# Altium PCB mach.PcbDoc
Units mil, origin at the board's own origin, x right, y up, seen from the top; angles counter-clockwise.
Board outline 1990 x 1810 mil, 2 copper layers (Top Layer, Bottom Layer); 21 components, 26 nets, 120 pads, 2 vias.
Unrouted connection lines stored in the file: 1.
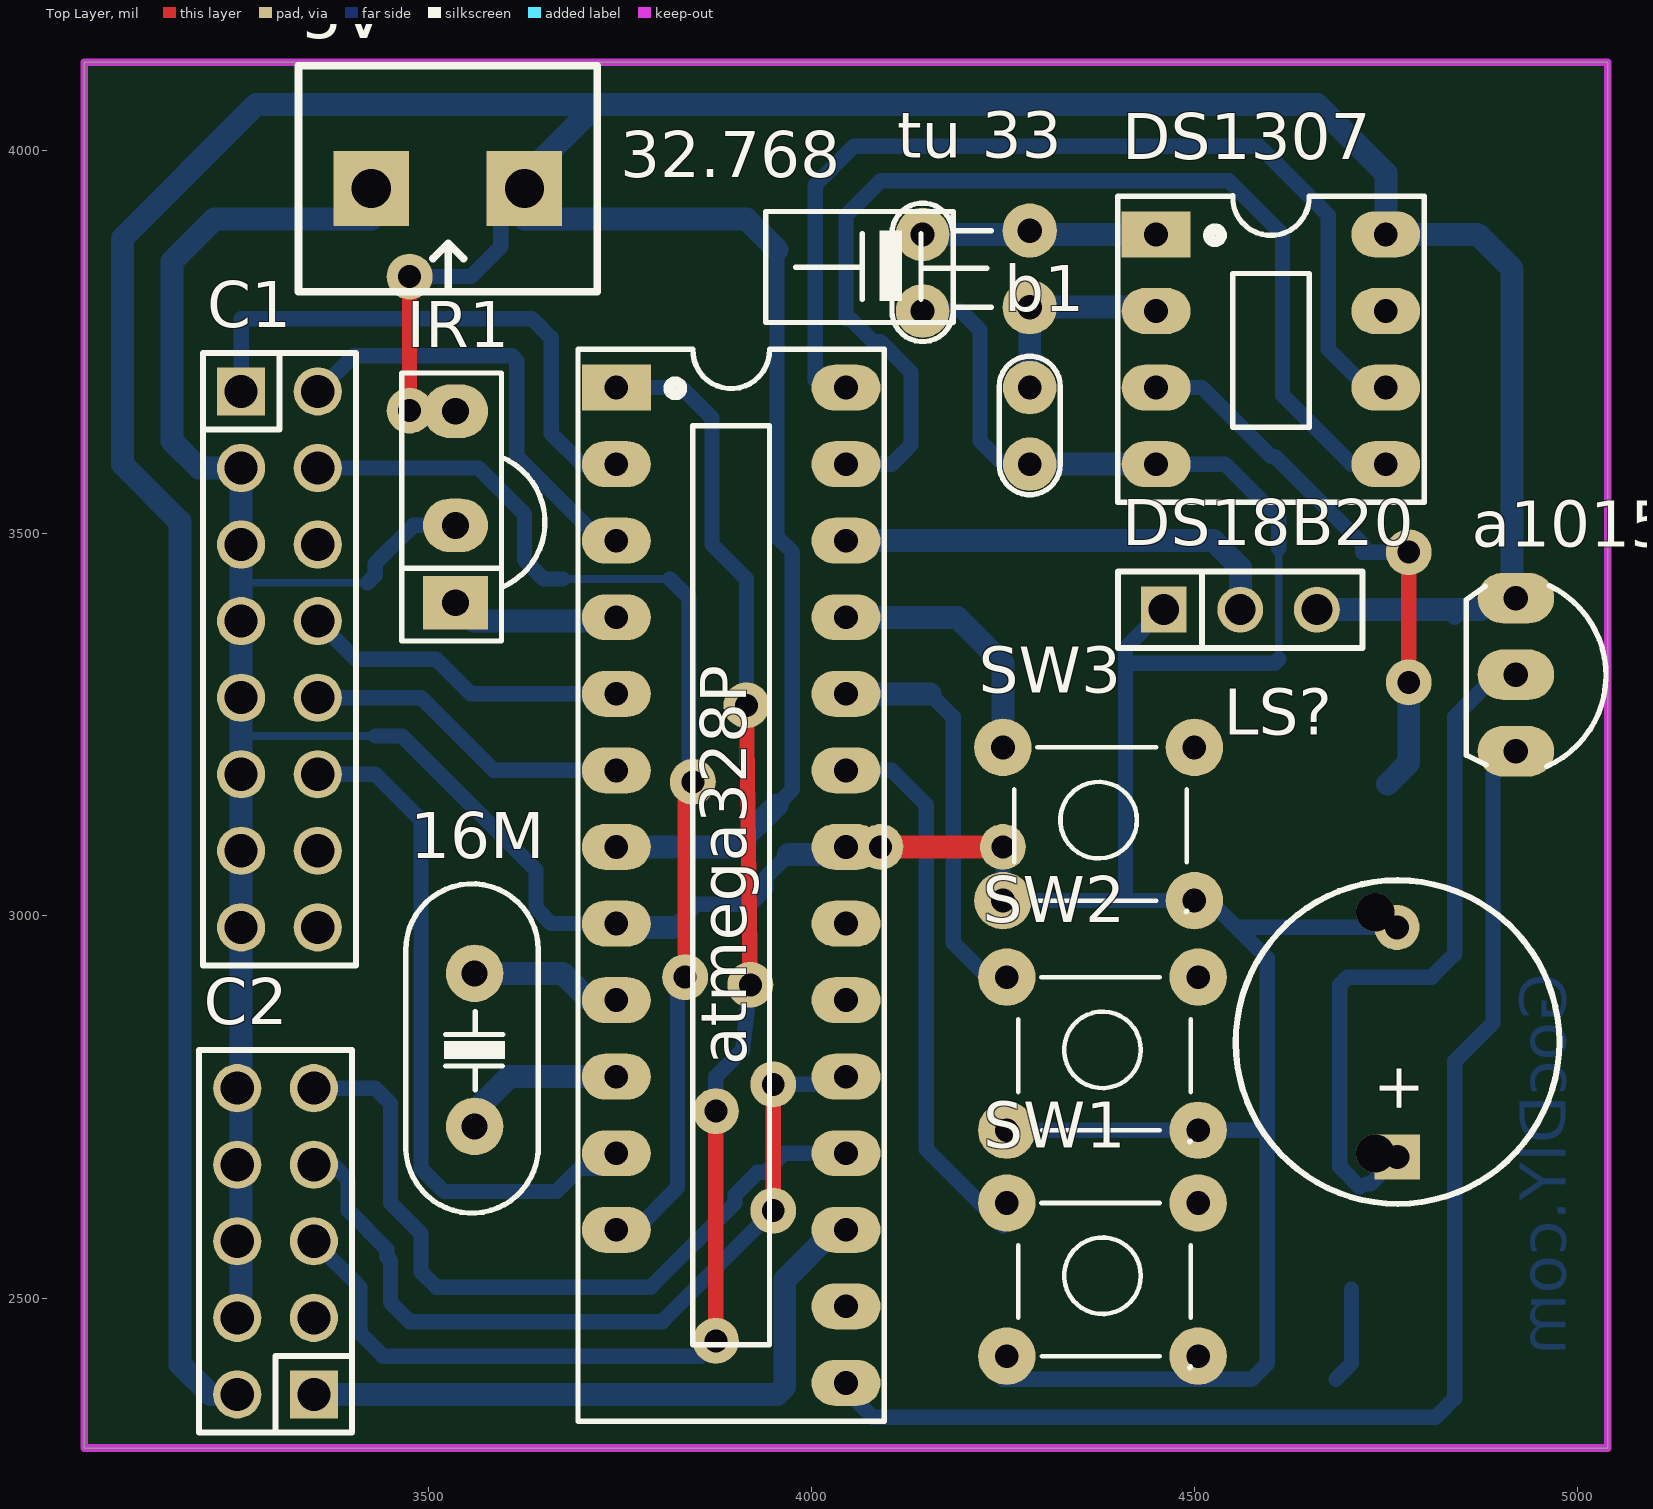
[diagram p0: Top Layer view]
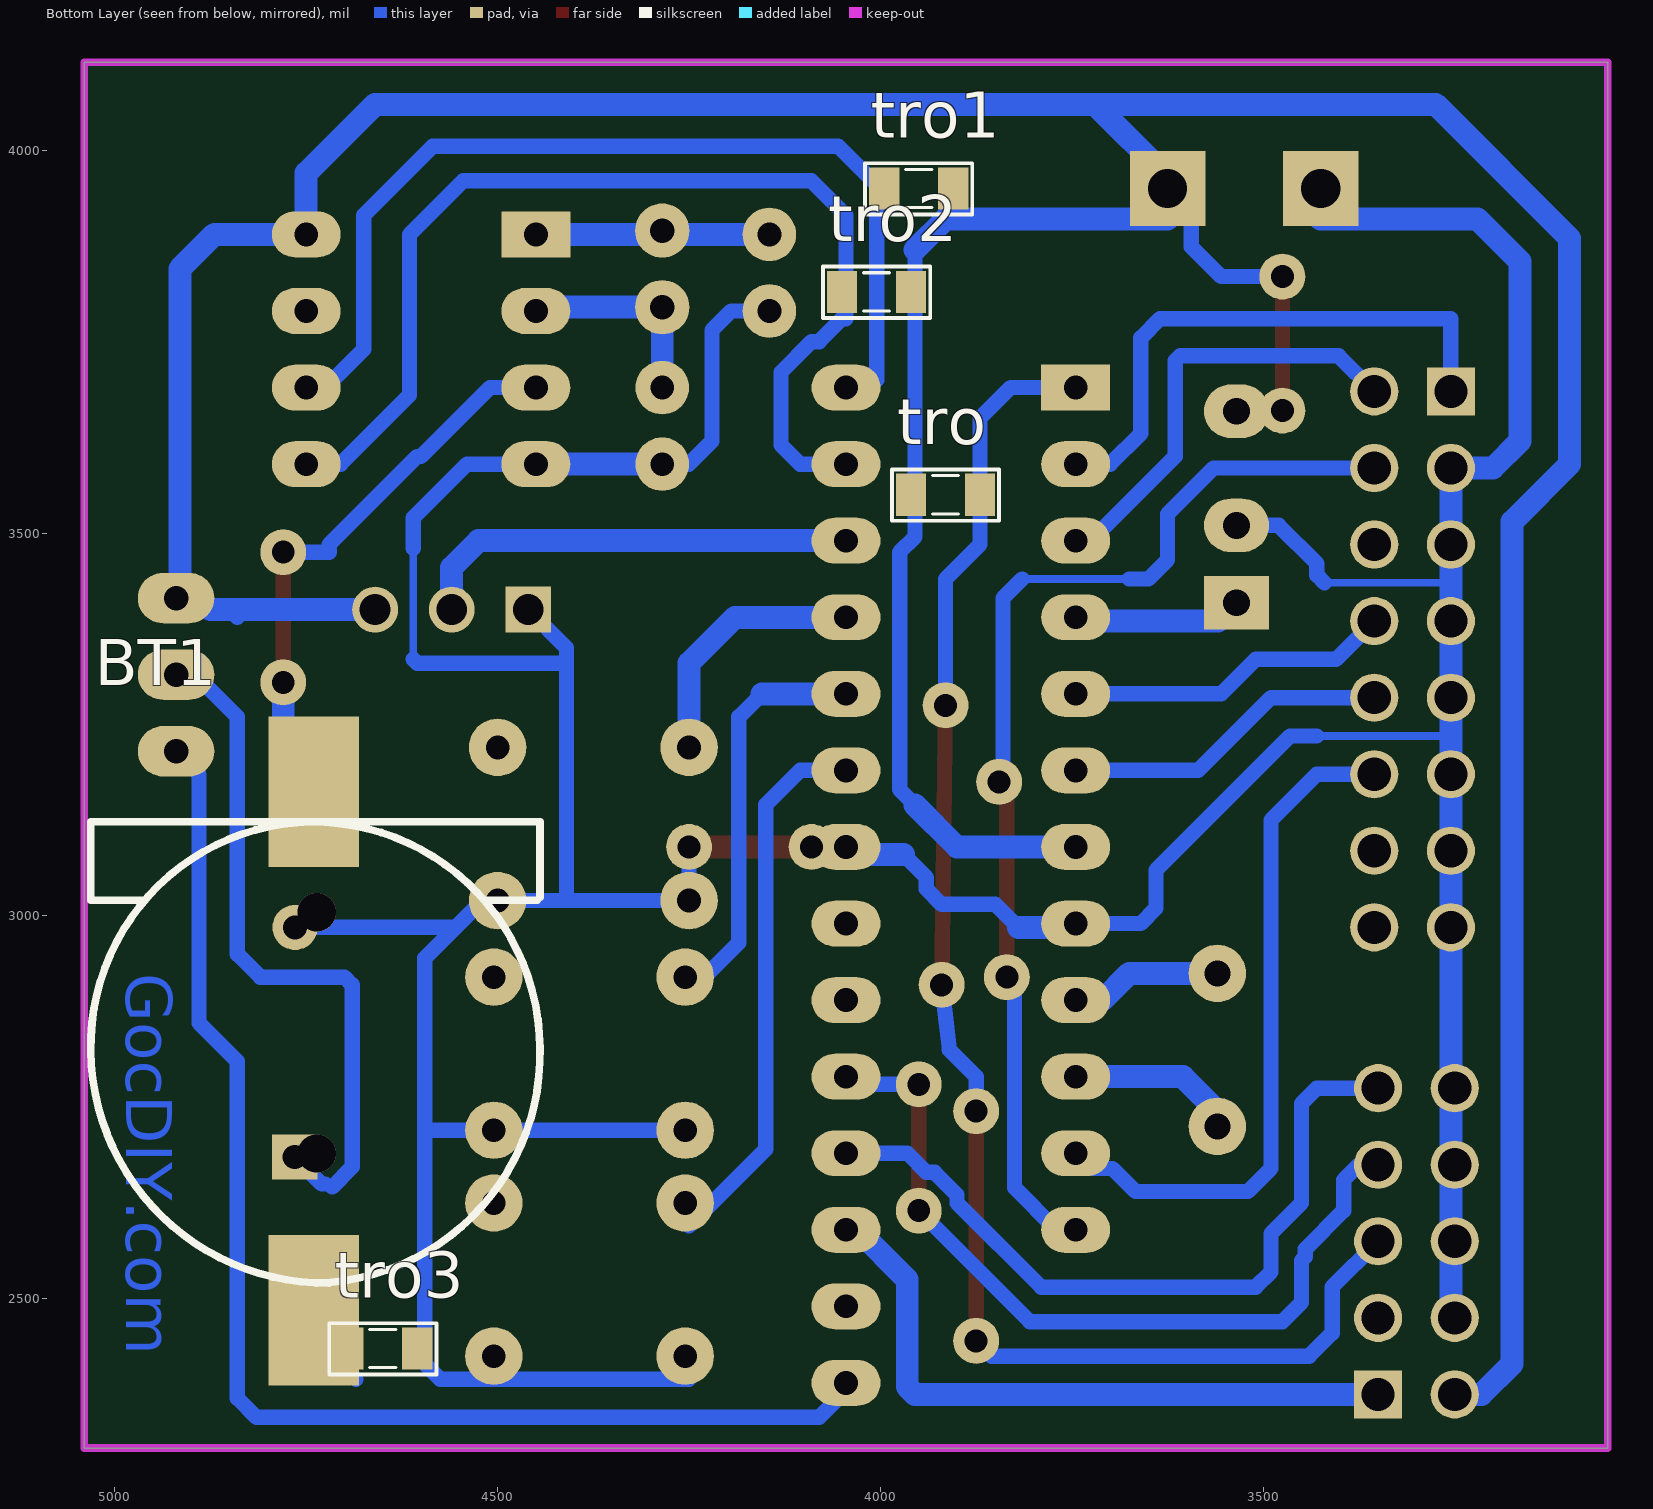
[diagram p1: Bottom Layer view, seen from below]
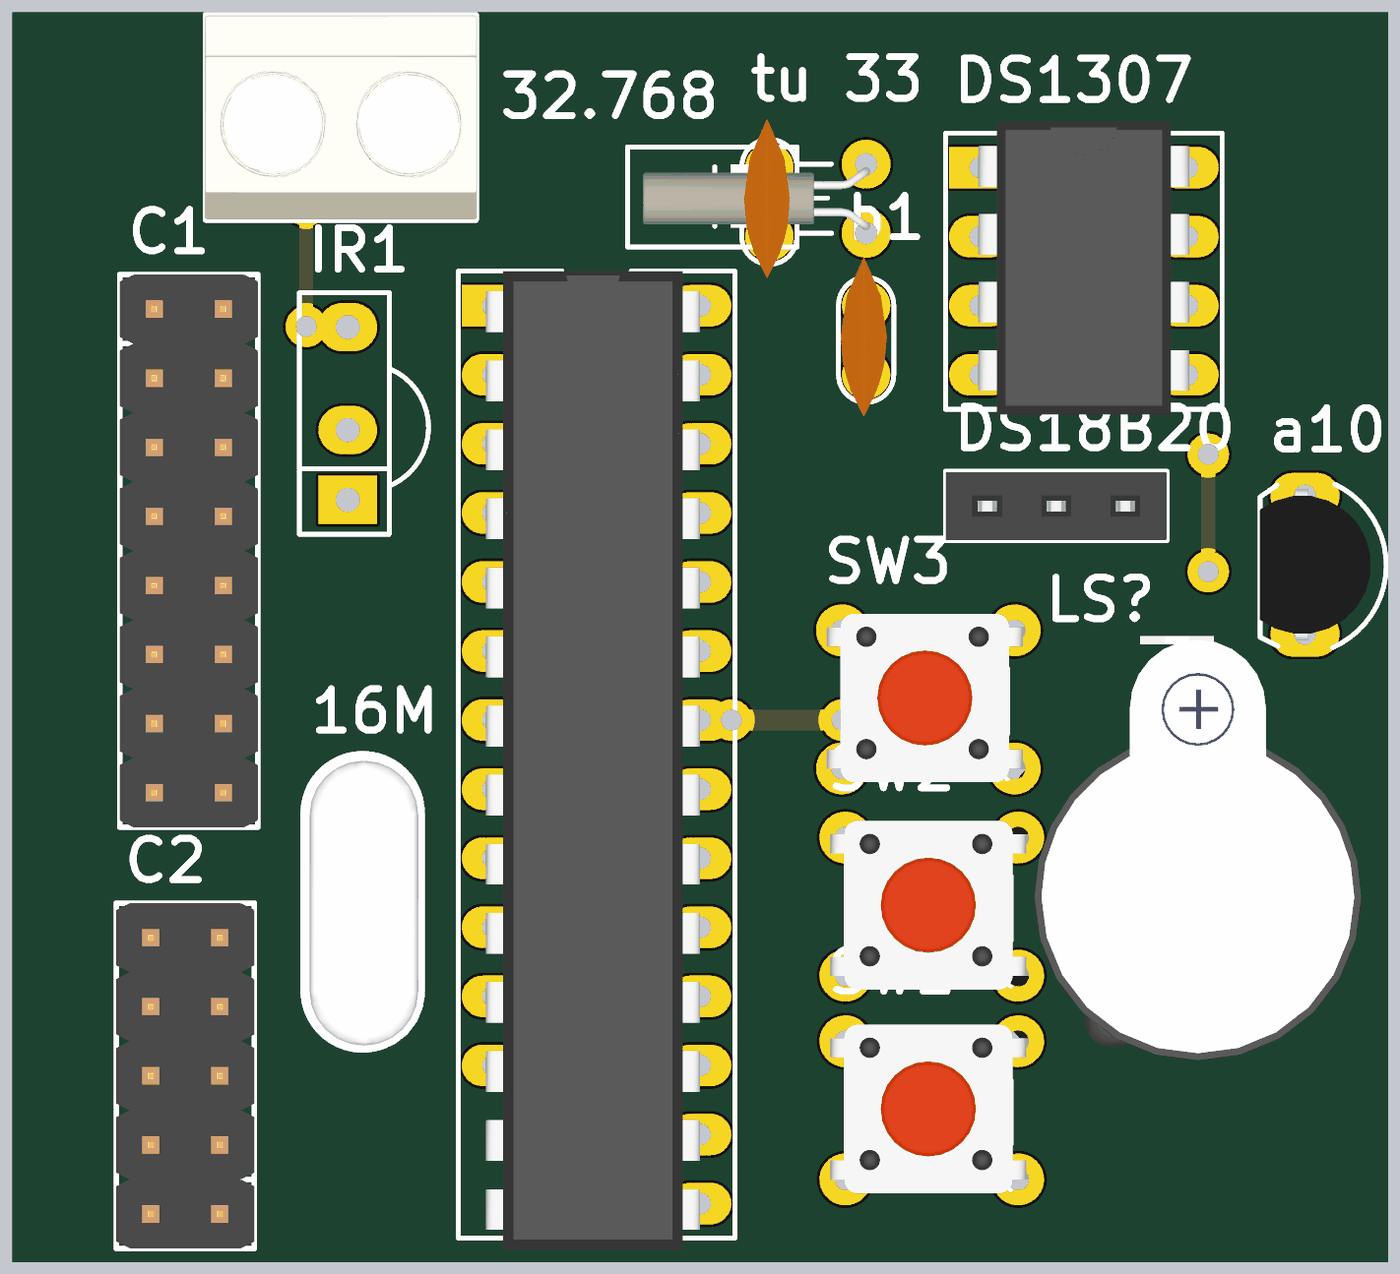
[diagram p2: 3D render of the assembled board from above, using the file's embedded part models]
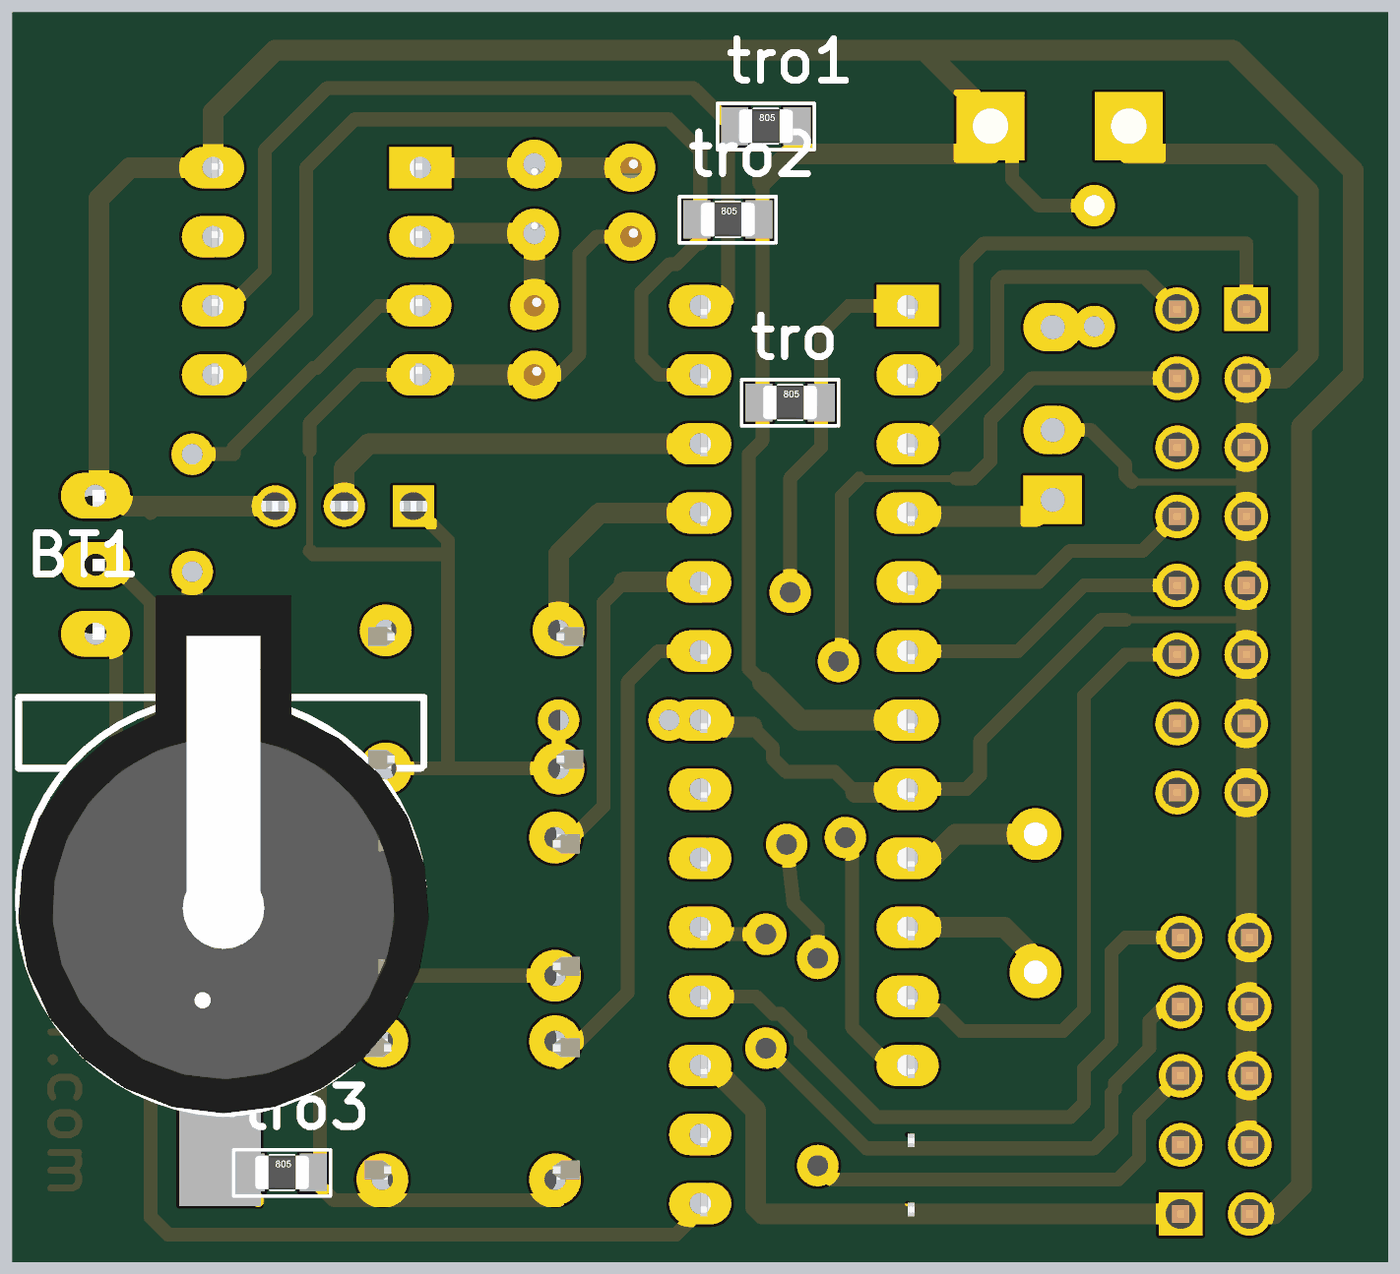
[diagram p3: 3D render of the assembled board from below, using the file's embedded part models]

## Layer stack, top to bottom
Top Solder: solder mask 0.4, Solder Resist, Dk 3.5
Top Layer: signal copper 1.4
Dielectric 1: dielectric 12.6, FR-4, Dk 4.8
Bottom Layer: signal copper 1.4
Bottom Solder: solder mask 0.4, Solder Resist, Dk 3.5

## Board outline
3050,2305 3050,4115 5040,4115 5040,2305

## Design rules (kind name [scope] priority, off if disabled: settings)
Clearance [All] p1: gap=10 ignorepadtopadclearanceinfootprint=FALSE except(0: Arc-Hole Track-Hole SMDPad-Hole THPad-Hole Via-Hole Fill-Hole Poly-Hole Region-Hole Text-Hole)
PolygonConnect [All] p1: connectstyle=Relief reliefconductorwidth=10 reliefentries=4 polygonreliefangle="90 Angle" airgapwidth=10
RoomDefinition Sheet1 [InComponentClass('Sheet1')] p1: confinementstyle=ConfineIn formatcopy=TRUE lockcomponents=FALSE outline 7155,1070 12035,1070 12035,2605 7155,2605
RoutingVias [All] p1: holewidth=28 width=50 viastyle="Through Hole" minholewidth=28 minwidth=50 maxholewidth=28 maxwidth=50
SolderMaskExpansion [All] p1: expansion=4
Width [All] p1: maxlimit=30 minlimit=10 preferedwidth=20
30 further rules are at their usual default settings.

## Classes and differential pairs
component class Sheet1: 5V 16M 32.768 a1015 atmega328P b1 BT1 C1 C2 DS18B20 DS1307 IR1 LS? SW1 SW2 SW3 tro "tu 33"

## Components (designator, comment, footprint, x,y, rotation, side; value= is the part's Value field where it differs from the comment)
5V "KF2" KF2-5.08 3525,3950 r180 top (schematic designator J1)
16M "16M" XT2 3560,2825 r90 top value=4Mhz (schematic designator X1)
32.768 "31.0592" XT32k 4285,3795 r180 top value=4Mhz (schematic designator X2)
a1015 "2SA1015" TO92-123 4920,3315 r270 top value=A1015 (schematic designator Q?)
atmega328P "ATmega8A-PU" DIP28 3745,3690 r270 top value=ATmega8-L (schematic designator IC1)
b1 "33p" CN1 4285,3590 r90 top value=100pF
BT1 "PIN 3V" "PIN CR1220-SMD" 4444.72,3122.79 r0 bottom
C1 "JP8x2" JP8-D2T 3305,3335 r270 top
C2 "JP5x2" JP5-D2T 3300,2575 r90 top
DS18B20 "DS18S20" JP3-C1T 4460,3400 r0 top (schematic designator IC2)
DS1307 "DS1307" DIP8 4600,3745 r270 top (schematic designator DS1)
IR1 "IR1" IR2 3535,3509 r90 top
LS? "Speaker" SPEAKER 4765,2685 r90 top
SW1 "SW" SW2-DIP 4255,2625 r0 top value="Button chip 4 pin"
SW2 "SW" SW2-DIP 4255,2920 r0 top value="Button chip 4 pin"
SW3 "SW" SW2-DIP 4250,3220 r0 top value="Button chip 4 pin"
tro "10k" RES-SMD-0805 3915,3550 r180 bottom
tro1 "10k" RES-SMD-0805 3950,3950 r180 bottom (schematic designator tro)
tro2 "10k" RES-SMD-0805 4005,3815 r180 bottom (schematic designator tro)
tro3 "10k" RES-SMD-0805 4650,2435 r180 bottom (schematic designator tro)
"tu 33" "33p" CN1 4145,3790 r90 top value=100pF (schematic designator a1)

## Footprints (in the part's own frame and the unit in brackets; to place one, negate y for a bottom-side part, rotate by r counter-clockwise, add the part's x,y. Pads: shape width x height; smd on the part's side, far side on the other; paste and mask are expansions set on the pad)
CN1 [mil]
  round 70 hole 31: 1(0,0) 2(100,0)
  silkscreen extent -40,-40 141,40, body extent -60,-30 170,37, height 265
DIP8 [mil] "DIP, 8-Leads, Row Spacing 7.62mm, Pitch 2.54mm, Body 9.91x6.73mm"
  rect 60x90 hole 31: 1(-145,-150)
  oval 60x90 hole 31: 2(-45,-150) 3(55,-150) 4(155,-150) 5(155,150) 6(55,150) 7(-45,150) 8(-145,150)
  silkscreen extent -195,-200 205,200, body extent -213,-153 213,153, height 177
DIP28 [mil] "DIP, 18-Leads, Row Spacing 7.62mm, Pitch 2.54mm, Body 22.8x7.3mm, Window"
  rect 60x90 hole 31: 1(0,0)
  oval 60x90 hole 31: 2(100,0) 3(200,0) 4(300,0) 5(400,0) 6(500,0) 7(600,0) 8(700,0) 9(800,0) 10(900,0) 11(1000,0) 12(1100,0) 15(1300,300) 16(1200,300) 17(1100,300) 18(1000,300) 19(900,300) 20(800,300) 21(700,300) 22(600,300) 23(500,300) 24(400,300) 25(300,300) 26(200,300) 27(100,300) 28(0,300)
  round 0 all layers, no hole: 13(1200,0) 14(1300,0)
  silkscreen extent -50,-50 1350,350, body extent -50,-10 1367,300, height 200
IR2 [mil] "Receiver Infared IC"
  rect 70x85 hole 35: 1(-100,0)
  oval 70x85 hole 35: 2(1,0) 3(150,0)
  silkscreen extent -150,-117 200,70
JP3-C1T [mm] "3 row, straight, gold plating"
  rect 1.52x1.52 hole 1.02: 1(0,0)
  round 1.52 hole 1.02: 2(2.54,0) 3(5.08,0)
  silkscreen extent -1.52,-1.27 6.6,1.27, body extent -1.52,-1.25 6.6,1.25, height 8.51
JP5-D2T [mm] "10 pins, dual pin, straight, gold plating"
  rect 1.6x1.6 hole 1.1: 1(-5.08,-1.27)
  round 1.6 hole 1.1: 2(-2.54,-1.27) 3(0,-1.27) 4(2.54,-1.27) 5(5.08,-1.27) 6(5.08,1.27) 7(2.54,1.27) 8(0,1.27) 9(-2.54,1.27) 10(-5.08,1.27)
  silkscreen extent -6.35,-2.54 6.35,2.54, body extent -6.35,-2.54 6.35,2.54, height 8.55
JP8-D2T [mm] "16 pins, dual pin, straight, gold plating"
  rect 1.6x1.6 hole 1.1: 1(-8.89,-1.27)
  round 1.6 hole 1.1: 2(-6.35,-1.27) 3(-3.81,-1.27) 4(-1.27,-1.27) 5(1.27,-1.27) 6(3.81,-1.27) 7(6.35,-1.27) 8(8.89,-1.27) 9(8.89,1.27) 10(6.35,1.27) 11(3.81,1.27) 12(1.27,1.27) 13(-1.27,1.27) 14(-3.81,1.27) 15(-6.35,1.27) 16(-8.89,1.27)
  silkscreen extent -10.16,-2.54 10.16,2.54, body extent -10.16,-2.54 10.16,2.54, height 8.55
KF2-5.08 [mm]
  rect 2.5x2.5 hole 1.3: 1(-2.54,0) 2(2.54,0)
  silkscreen extent -4.95,-4.08 4.95,3.43, body extent -5,-4.07 5,3.43, height 10
"PIN CR1220-SMD" [mm]
  rect 3x5 smd: 1(7.5,-1) 2(7.5,16.2)
  silkscreen extent 0,0 14.9,15.3, body extent -0.18,-3.75 14.92,15.3, height 3
RES-SMD-0805 [mil]
  rect 39.37x55 smd: 1(-45,0) 2(45,0)
  silkscreen extent -70,-34 70,33, body extent -39,-25 39,25, height 31
SPEAKER [mm]
  rect 1.5x1.5 hole 0.8: 1(0,0)
  round 1.5 hole 0.8: 2(7.62,0.013)
  silkscreen extent -1.55,-5.38 9.18,5.36, body extent -2.22,-6 13.24,6, height 4.5
SW2-DIP [mil] "SW button 4pin, 250 x250 mil"
  round 75 hole 31: 1(0,0) 2(0,-200) 3(250,-200) 4(250,0)
  silkscreen extent 15,-215 240,0, body extent -36,-220 276,24, height 276
TO92-123 [mil] "TO-92"
  oval 66x100 hole 32: 1(-100,0) 2(0,0) 3(100,0)
  silkscreen extent -117,-65 120,118, body extent -109,-66 109,96, height 245
XT2 [mil] "Footpin for Crystal 2 pin"
  round 75 hole 34: 1(-100,0) 2(100,0)
  silkscreen extent -213,-83 217,90, body extent -216,-87 216,90, height 144
XT32k [mm]
  round 1.8 hole 0.813: 1(0,0) 2(0,-2.54)
  silkscreen extent 1.27,-3.17 8.76,0.51, body extent -0.15,-2.42 8.2,-0.12, height 1.95

## Part data
5V: Manufacturer="Würth Elektronik eiSos GmbH", partNo=691103110002, ComponentLink1 Description=Manufacturer, ComponentLink1URL=http://www.we-online.com, ComponentLink2 Description=Datasheet, ComponentLink2URL=http://katalog.we-online.de/em/datasheet/6911031100xx.pdf, Created by="Karrer Zheng", Created Date="29 October 2013", NoPins=2
16M 32.768: library part XT2, "Crystal, 32.768 KHz, -40 to 85 degC, 3.2 x 1.5 x 0.9 mm SMD"
a1015: "PNP 600mW, ECB", =A1013
atmega328P: "8-Bit AVR Microcontroller with 8K Bytes of In-System Programmable Flash Memory"
b1 "tu 33": library part CN1, "Cap np  1pF - 472pF"
BT1: "Battery 3VDC"
C1: "WR-PHD 2.54 mm Dual Socket Header", Manufacturer="Würth Elektronik eiSos GmbH", partNo=61301621821, ComponentLink1 Description=Manufacturer, ComponentLink1URL=http://www.we-online.com, ComponentLink2 Description=Datasheet, ComponentLink2URL=http://katalog.we-online.de/em/datasheet/6130xx21821.pdf, Created by="Karrer Zheng", Created Date="29 March 2013", NoPins=16
C2: "WR-PHD 2.54 mm Dual Socket Header", Manufacturer="Würth Elektronik eiSos GmbH", partNo=61301021821, ComponentLink1 Description=Manufacturer, ComponentLink1URL=http://www.we-online.com, ComponentLink2 Description=Datasheet, ComponentLink2URL=http://katalog.we-online.de/em/datasheet/6130xx21821.pdf, Created by="Karrer Zheng", Created Date="29 March 2013", NoPins=10
DS18B20: "High Precision  1-Wire® Digital Thermometer"
DS1307: "Real Timer Serial"
IR1: "Receiver Infraed IC"
LS?: "Loudspeaker", LatestRevisionDate=17-Jul-2002, LatestRevisionNote="Re-released for DXP Platform.", PackageReference=PIN2, Published=24-Mar-1999, Publisher="Altium Limited"
SW1 SW2 SW3: library part SW4, "Switch button 4 pin"
tro tro1 tro2 tro3: library part Res-SMD, "Resistor", Manufacturer="Generic Components", Class=Passive, Published=08/06/2000, Publisher="Altium Hobart Technology Centre"

## Free pads (board coordinates)
  round 60 hole 30: 2(3950,2615) 3(3950,2780) 4(3875,2445) 5(3875,2745) 8(3920,2910) 9(3915,3275) 10(4090,3090) 11(4250,3090) 14(3475,3660) 15(3475,3835) 16(4780,3305) 17(4780,3475) 18(3835,2920) 19(3845,3175) 20(3845,3175)

## Via types
v1: diameter 50, hole 50, Top Layer to Bottom Layer, 2 vias

## Nets (pads, with @x,y where several pads share a name; then routed paths per layer and width w, separated by ;. In a path a pad name is that pad's centre, name@x,y a point inside that pad or via, vN(x,y) a via of type N, cw(c..) or ccw(c..) an arc to the next point about the centre after c; other vN are vias at no path point)
A: atmega328P.3 C1.16 | length 582.5
  Bottom Layer w20: C1.16 3401.5,3731.5 3608.5,3731.5 3615,3725 3615,3600 3725,3490 atmega328P.3
B: atmega328P.12 C1.15 pad.18 pad.19 pad.20 | length 1447.5
  Top Layer w20: pad.18 3835,3165 pad.20
  Bottom Layer w10: 3675,3440 3815,3440
  Bottom Layer w20: C1.15 3565,3585 3625,3525 3625,3465 3650,3440 3675,3440 ; atmega328P.12 3770,2590 3825,2645 pad.18@3825,2920 ; 3815,3440 3840,3415 pad.20@3840,3195
cb: atmega328P.26 DS18B20.2 | length 584.5
  Bottom Layer w30: atmega328P.26 4525,3490 4560,3455 DS18B20.2
CLK: atmega328P.5 C1.13 | length 429.4
  Bottom Layer w20: C1.13 3405,3335 3510,3335 3555,3290 atmega328P.5
DATA: atmega328P.11 C1.11 | length 914.7
  Bottom Layer w20: C1.11 3430,3185 3490,3125 3490,2670 3520,2640 3666.86,2640 3696.86,2670 3745,2670 atmega328P.11
GND: 5V.2 "tu 33.1" atmega328P.8 atmega328P.22 b1.1 BT1.2 C1.2 C1.3 C1.4 C1.5 C1.6 C1.7 C1.8 C2.6 C2.7 C2.8 C2.9 DS18B20.1 DS1307.4 IR1.2 LS?.2 pad.10 pad.11 SW1.2 SW1.3 SW2.2 SW2.3 SW3.2 SW3.3 | length 6691.9
  Top Layer w30: atmega328P.22 pad.10 pad.11
  Bottom Layer w10: 3255,3235 3430,3235 ; 3255,3435 3420,3435 ; 4610,3335 4610,3480
  Bottom Layer w20: C1.2 C1.2@3260,3585 ; 3420,3435 3430,3445 3430,3460 3480,3510 IR1.2 ; 3430,3235 3465,3235 3640,3060 3640,3010 3660,2990 atmega328P.8 ; 3820,2985 3850,3015 3920,3015 3940,3035 3940,3050 3970,3080 ; 4145,3790 4195,3790 4220,3765 4220,3620 4250,3590 b1.1 ; SW1.2@4250,2395 4575,2395 4595,2415 4595,2720 ; pad.11 SW3.2 4410,3020 ; SW2.2 SW2.3 4595,2720 ; DS1307.4 4540,3590 4610,3520 4610,3480 ; DS18B20.1 4410,3350 4410,3330 ; 4610,3335 4605,3330 4410,3330 ; BT1.2@4685,2395 4705.28,2415.28 BT1.2@4705.28,2512.21 ; LS?.2 4560,2985 4557.5,2982.5 ; 4410,3020 4410,3330 ; 4410,3020 SW3.3 4520,3020 4557.5,2982.5 ; 4557.5,2982.5 4595,2945 4595,2720
  Bottom Layer w30: C2.9 3255,2480 C1.8 C1.7 C1.6 3255,3235 C1.5 C1.4 3255,3435 C1.3 C1.2 3200,3585 3165,3620 3165,3855 3220,3910 5V.2@3425,3910 ; atmega328P.8 3750,2985 3820,2985 ; 3970,3080 4035,3080 atmega328P.22 ; b1.1 DS1307.4
loa: a1015.3 atmega328P.15 | length 1708
  Bottom Layer w20: atmega328P.15 4045,2380 4080,2345 4815,2345 4840,2370 4840,2810 4890,2860 4890,3185 a1015.3
MISO: atmega328P.18 C2.5 | length 986.9
  Bottom Layer w20: C2.5 3430,2775 3450,2755 3450,2625 3490,2585 3490,2535 3510,2515 3790,2515 3900,2625 3900,2635.71 3929.29,2665 3940,2665 3965,2690 atmega328P.18
MOSI: atmega328P.17 C2.1 | length 866.1
  Bottom Layer w30: C2.1 3955,2375 3965,2385 3965,2525 4030,2590 atmega328P.17
Neta1_2: 32.768.2 "tu 33.2" DS1307.1 | length 305
  Bottom Layer w30: 4145,3890 DS1307.1
Netb1_2: 32.768.1 b1.2 DS1307.2 | length 272.1
  Bottom Layer w30: b1.2 32.768.1 4445,3795 DS1307.2
NetBT1_1: BT1.1 DS1307.3 pad.16 pad.17 | length 739.3
  Top Layer w20: pad.16 pad.17
  Bottom Layer w20: DS1307.3 4510,3690 4600,3600 4605,3600 4720,3485 4720,3475 pad.17
  Bottom Layer w30: BT1.1@4752.17,3172.17 4780,3200 pad.16
NetIC1_9: 16M.2 atmega328P.9 | length 199.5
  Bottom Layer w30: 16M.2 3675,2925 3710,2890 atmega328P.9
NetIC1_10: 16M.1 atmega328P.10 | length 223.6
  Bottom Layer w30: 16M.1 3560,2745 3605,2790 atmega328P.10
NetIC1_23: atmega328P.23 SW1.1 | length 715.1
  Bottom Layer w20: atmega328P.23 4105,3190 4150,3145 4150,2695 SW1.1@4250,2595
NetIC1_24: atmega328P.24 SW2.1 | length 536.1
  Bottom Layer w20: 4155,3290 4185,3260 4185,2965 4230,2920 SW2.1
  Bottom Layer w30: atmega328P.24 4155,3290
NetIC1_25: atmega328P.25 SW3.1 | length 339.9
  Bottom Layer w30: atmega328P.25 4190,3390 4250,3330 SW3.1
NetLS?_1: a1015.2 LS?.1 | length 914
  Bottom Layer w10: 4719.49,2649.72 4725,2649.72
  Bottom Layer w20: 4715.96,2646.19 4690,2672.15 4690,2910 4700,2920 4810,2920 4840,2950 4840,3260 4895,3315 a1015.2 ; 4725,2649.72 4729.72,2649.72 LS?.1
OE: atmega328P.2 C1.1 | length 736.9
  Bottom Layer w20: C1.1 3255,3780 3635,3780 3660,3755 3660,3630 3700,3590 atmega328P.2
OUT: atmega328P.4 IR1.1 | length 222
  Bottom Layer w20: IR1.1 IR1.1@3559,3385
  Bottom Layer w30: IR1.1@3559,3385 3740,3385 atmega328P.4
RST: atmega328P.1 C2.3 pad.4 pad.5 pad.8 pad.9 tro.2 | length 2010.9
  Top Layer w20: pad.4 pad.5 ; pad.9 pad.8
  Bottom Layer w20: C2.3 3410,2515 3410,2455 3440,2425 3855,2425 pad.4 ; atmega328P.1 3830,3690 3870,3650 tro.2 3870,3485 3915,3440 pad.9 ; pad.5 3875,2790 3910,2825 pad.8
SCK: atmega328P.19 C2.4 pad.2 pad.3 | length 1070.6
  Top Layer w20: pad.2 pad.3
  Bottom Layer w20: C2.4 3375,2675 3395,2655 3395,2615 3445,2565 3445,2555 3450,2550 3450,2495 3475,2470 3805,2470 pad.2 ; pad.3 4035,2780 atmega328P.19
SCL: atmega328P.28 DS1307.6 | length 1297.8
  Bottom Layer w20: atmega328P.28 4015,3690 4005,3700 4005,3955 4055,4005 4585,4005 4675,3915 4675,3740 4725,3690 DS1307.6
SCLK: atmega328P.6 C1.12 | length 429.4
  Bottom Layer w20: C1.12 3490,3285 3585,3190 atmega328P.6
SDA: atmega328P.27 DS1307.5 | length 1439.3
  Bottom Layer w20: atmega328P.27 4105,3590 4130,3615 4130,3710 4090,3750 4080,3750 4050,3780 4045,3780 4045,3915 4090,3960 4545,3960 4615,3890 4615,3680 4705,3590 DS1307.5
VCC: 5V.1 a1015.1 atmega328P.7 C2.10 DS18B20.3 DS1307.8 IR1.3 pad.14 pad.15 tro.1 | length 6217.3
  Top Layer w20: pad.14 pad.15
  Bottom Layer w20: pad.15 3555,3835 3593.9,3873.9 5V.1@3593.9,3950 ; 3955,3145 3975,3165 3975,3475 3955,3495 3955,3870 ; DS18B20.3@4650,3390 DS18B20.3 ; 4840,3390 4850,3400
  Bottom Layer w30: C2.10 3215,2375 3175,2415 3175,3515 3100,3590 3100,3885 3275,4060 3720,4060 ; atmega328P.7 3900,3090 3955,3145 ; 3955,3870 3915,3910 3625,3910 3625,3965 3720,4060 ; DS18B20.3 4850,3400 4875,3400 4915,3440 4915,3845 4870,3890 DS1307.8 4750,3970 4660,4060 3720,4060
pads on no net: atmega328P.13 atmega328P.14 atmega328P.16 atmega328P.20 atmega328P.21 C1.9 C1.10 C1.14 C2.2 DS1307.7 SW1.4 SW2.4 SW3.4 tro1.1 tro1.2 tro2.1 tro2.2 tro3.1 tro3.2
copper on no net:
  other v1: 4736.06,2689.72 4736.06,3004.69

## Keep-outs
Keep-Out Layer:
  the board outline again, w10

## Other copper
Bottom Layer:
  text "GocDIY.com" at 4985,2925 h60 r90

## Text inside footprints (layer, text, board x,y; h text height)
LS?: Top Overlay "+" at 4793,2740.5 h60 r90